# Altium PCB extern.PcbDoc
Units mil, origin at the board's own origin, x right, y up, seen from the top; angles counter-clockwise.
Board outline 1574.8 x 1181.1 mil, 2 copper layers (Top Layer, Bottom Layer); 7 components, 11 nets, 32 pads, 4 vias.
Unrouted connection lines stored in the file: 4.
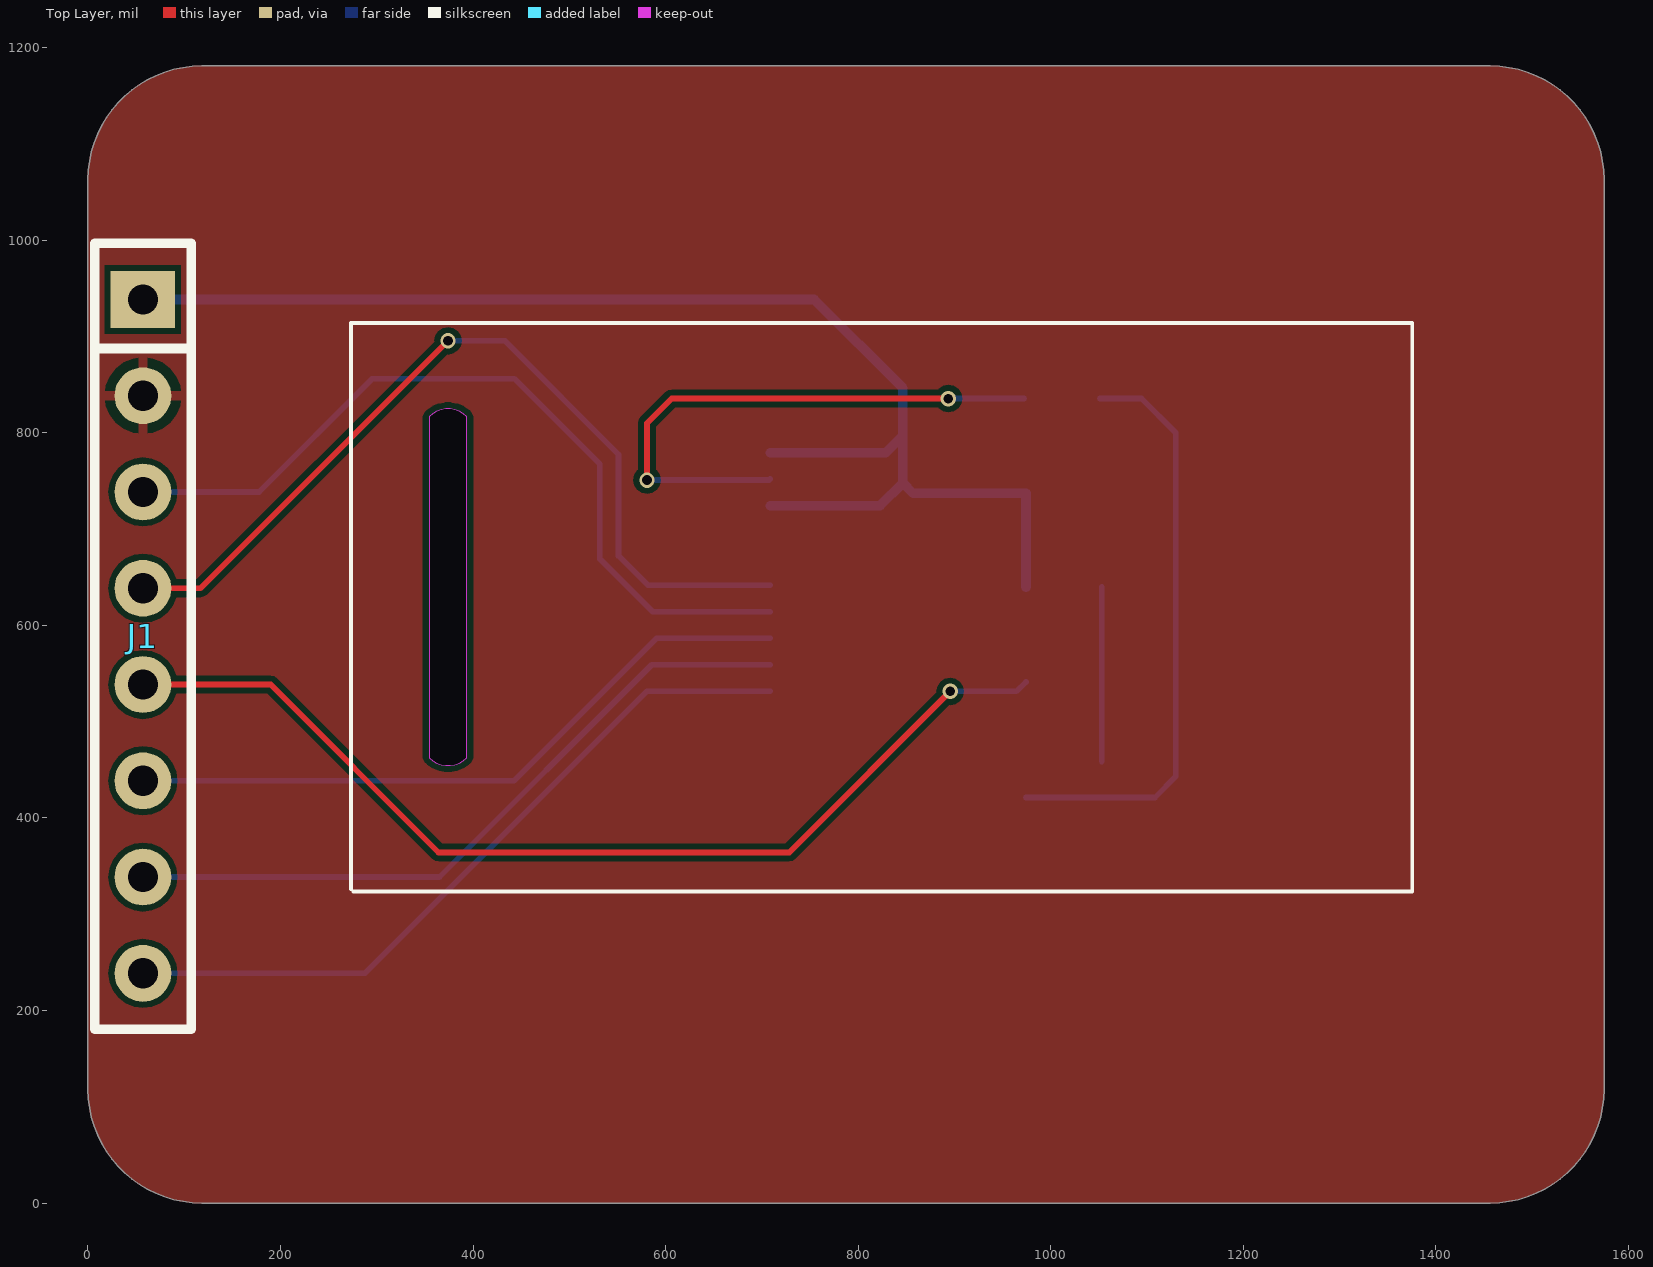
[diagram p0: Top Layer view]
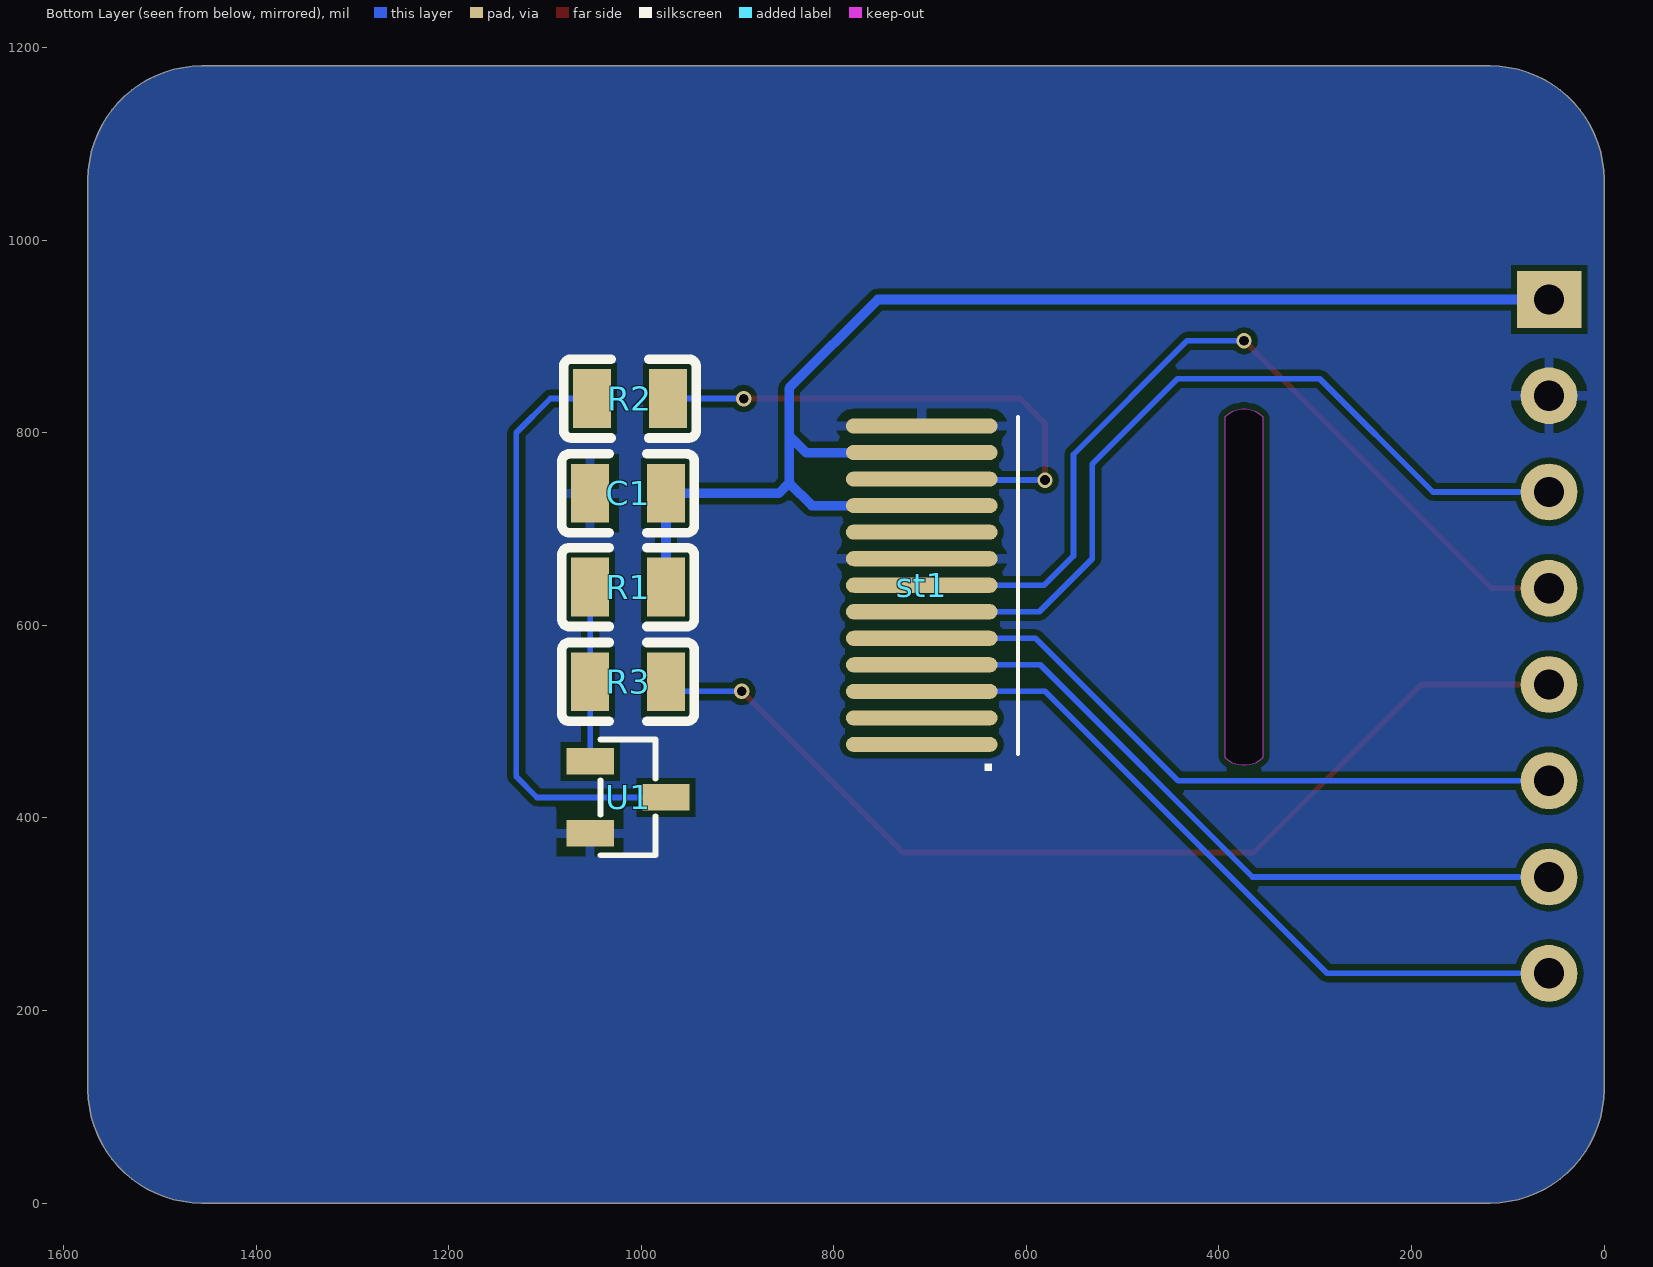
[diagram p1: Bottom Layer view, seen from below]
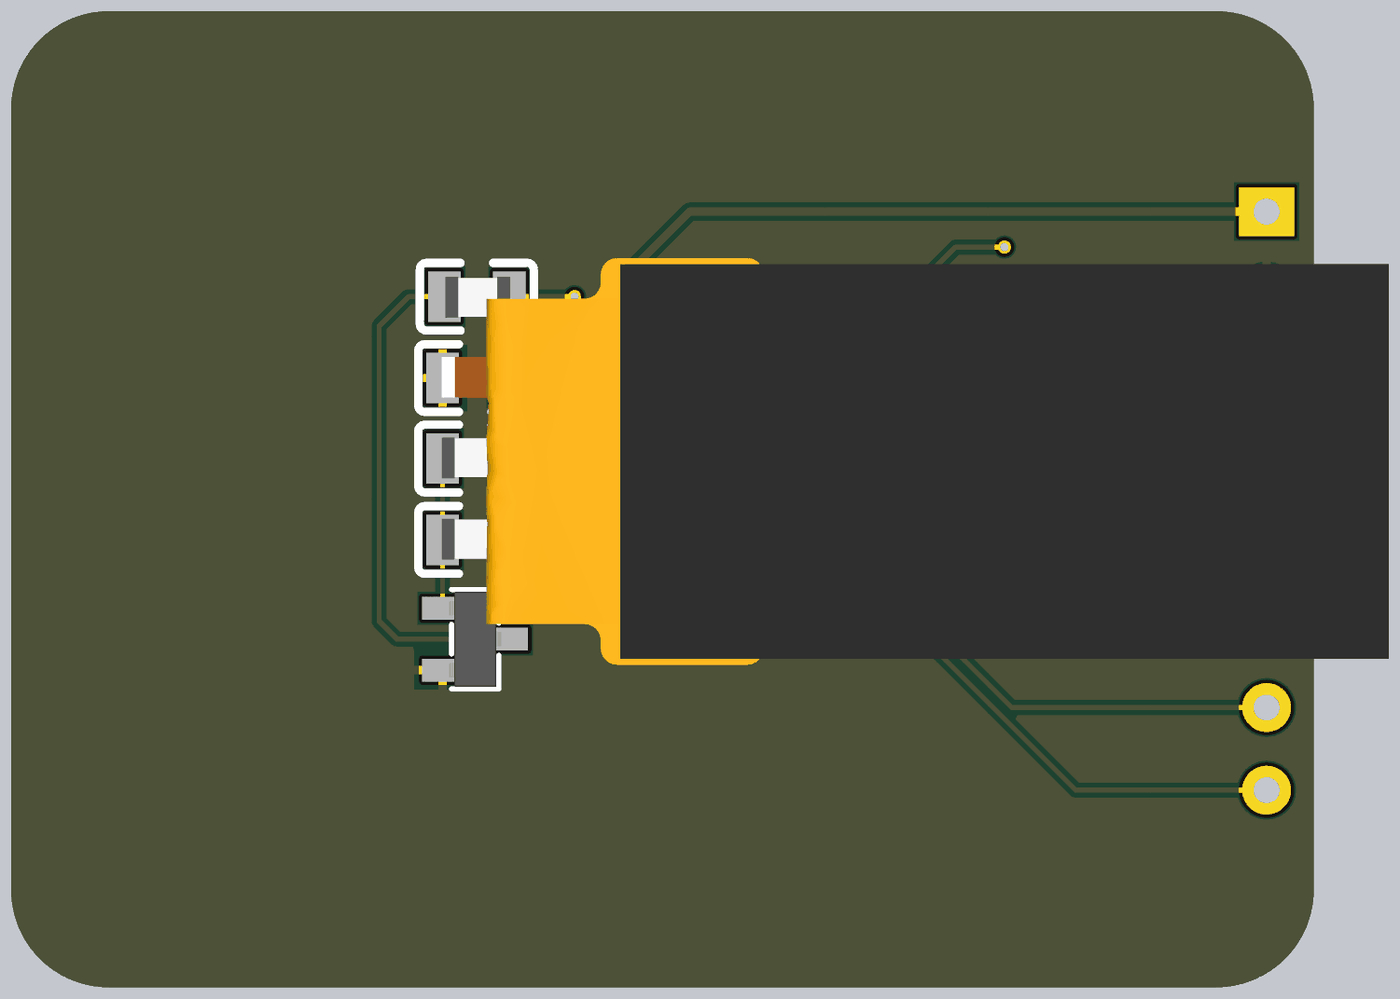
[diagram p2: 3D render of the assembled board from below, using the file's embedded part models]

## Layer stack, top to bottom
Top Solder: solder mask 0.4, Solder Resist, Dk 3.5
Top Layer: signal copper 1.4
Dielectric 1: dielectric 12.6, FR-4, Dk 4.8
Bottom Layer: signal copper 1.4
Bottom Solder: solder mask 0.4, Solder Resist, Dk 3.5

## Board outline
0,118.11 0,1062.99 cw(c118.11,1062.99) 118.11,1181.1 1456.69,1181.1 cw(c1456.69,1062.99) 1574.8,1062.99 1574.8,118.11 cw(c1456.69,118.11) 1456.69,0 118.11,0 cw(c118.11,118.11)
cut-out: 354.33,462.6 ccw(c374.02,482.28) 393.7,462.6 393.7,816.93 ccw(c374.02,797.24) 354.33,816.93

## Design rules (kind name [scope] priority, off if disabled: settings)
Clearance [All] p1: gap=6 ignorepadtopadclearanceinfootprint=FALSE except(10: Arc-Arc Arc-Track Track-Track)
ComponentClearance [All] p1 off: gap=10 collisioncheckmode=3 verticalgap=10 showdistances=FALSE
PolygonConnect [All] p1: connectstyle=Relief reliefconductorwidth=10 reliefentries=4 polygonreliefangle="90 Angle" airgapwidth=10
RoutingVias [All] p1: holewidth=8 width=16 viastyle="Through Hole" minholewidth=6 minwidth=12 maxholewidth=28 maxwidth=50
SolderMaskExpansion [All] p1: expansion=4 istentingtop=FALSE
Width [All] p1: maxlimit=20 minlimit=6 preferedwidth=10
29 further rules are at their usual default settings.

## Classes and differential pairs
component class extern: C1 R1 R2 R3 U1

## Components (designator, comment, footprint, x,y, rotation, side; value= is the part's Value field where it differs from the comment)
C1 "1uf" C0805 949.88,703.15 r0 bottom
J1 "8P" 8P-P2.54 57.09,588.58 r270 top locked
R1 "10k" R0805 949.88,605.71 r0 bottom
R2 "10" R0805 1075.71,869.68 r180 bottom
R3 "1k" R0805 949.88,507.28 r0 bottom
st1 "st7735s" st7735s 638.66,451.38 r180 bottom locked
U1 "S8050_C908252" s8050 1013.78,421.26 r0 bottom

## Footprints (in the part's own frame and the unit in brackets; to place one, negate y for a bottom-side part, rotate by r counter-clockwise, add the part's x,y. Pads: shape width x height; smd on the part's side, far side on the other; paste and mask are expansions set on the pad)
8P-P2.54 [mm] "J8"
  rect 1.5x1.7 hole 0.8: 1(-8.89,0)
  round 1.5 hole 0.8: 2(-6.35,0) 3(-3.81,0) 4(-1.27,0) 5(1.27,0) 6(3.81,0) 7(6.35,0) 8(8.89,0)
  silkscreen extent -10.37,-1.27 10.37,1.27
C0805 [mm] "C?"
  rect 1x1.55 smd: 1(0.623,-0.865) 2(2.623,-0.865)
  silkscreen extent -0.13,-1.91 3.37,0.18, body extent 0.65,-1.51 2.65,-0.26, height 0.6
R0805 [mm] "R?"
  rect 1x1.55 smd: 1(0.623,-0.865) 2(2.623,-0.865)
  silkscreen extent -0.13,-1.91 3.37,0.18, body extent 0.65,-1.52 2.65,-0.26, height 0.43
s8050 [mm] "SOT-23-3_L2.9-W1.3-P1.90-LS2.4-BR"
  rect 1.25x0.7 smd: 1(1,-0.95) 2(1,0.95) 3(-1,0)
  silkscreen extent -0.73,-1.53 0.73,1.53, body extent -1.23,-1.46 1.25,1.46, height 0.65
st7735s [mm] "st7735s?"
  oval 4x0.4 smd: 1(-1.778,0.635) 2(-1.778,1.335) 3(-1.778,2.035) 5(-1.778,3.435) 6(-1.778,4.135) 7(-1.778,4.835) 8(-1.778,5.535) 9(-1.778,6.235) 10(-1.778,6.935) 11(-1.778,7.635) 12(-1.778,8.335) 13(-1.778,9.035)
  oval 4x0.4 smd paste+0: 4(-1.778,2.735)
  silkscreen extent -0.13,-0.07 0.76,9.27, body extent -9.19,-1.55 18.53,10.95, height 1.55

## Part data
C1: library part C0805
R1 R2 R3: library part R0805
U1: library part s8050

## Via types
v1: diameter 16, hole 10, Top Layer to Bottom Layer, 4 vias

## Nets (pads, with @x,y where several pads share a name; then routed paths per layer and width w, separated by ;. In a path a pad name is that pad's centre, name@x,y a point inside that pad or via, vN(x,y) a via of type N, cw(c..) or ccw(c..) an arc to the next point about the centre after c; other vN are vias at no path point)
+3.3: C1.1 J1.1 R1.1 st1.10 st1.12 | length 1448.5
  Bottom Layer w10: J1.1 754.33,938.58 846.46,846.46 846.46,797.24 ; st1.10 822.83,724.41 846.46,748.03 ; st1.12 828.74,779.53 846.46,797.24 ; R1.1 C1.1 857.28,737.2 846.46,748.03 ; 846.46,748.03 846.46,797.24
GND: C1.2 J1.2 st1.8 st1.13 U1.2
LEDK: R2.2 st1.11 | length 589.7
  Top Layer w6: v1(580.71,750.98) 580.71,810.04 606.3,835.63 v1(893.7,835.63)
  Bottom Layer w6: v1(580.71,750.98) 707.68,750.98 st1.11 ; v1(893.7,835.63) R2.2
NetR1_2: R1.2 R3.2 U1.1 | length 181.1
  Bottom Layer w6: U1.1 R3.2 R1.2
NetR2_1: R2.1 U1.3 | length 615.2
  Bottom Layer w6: U1.3 1108.27,421.26 1129.92,442.91 1129.92,800.2 1094.49,835.63 R2.1
TFT_BLK: J1.5 R3.1 | length 1063
  Top Layer w6: J1.5 189.76,538.58 364.17,364.17 728.35,364.17 v1(895.67,531.5)
  Bottom Layer w6: v1(895.67,531.5) 964.57,531.5 R3.1
TFT_CS: J1.4 st1.7 | length 924.9
  Top Layer w6: J1.4 116.93,638.58 v1(374.02,895.67)
  Bottom Layer w6: v1(374.02,895.67) 433.07,895.67 551.18,777.56 551.18,672.23 581.68,641.73 st1.7
TFT_DC: J1.6 st1.5 | length 734.6
  Bottom Layer w6: J1.6 442.54,438.58 590.57,586.61 st1.5
  Bottom Layer w10: J1.6 J1.6@72.44,423.23
TFT_RES: J1.3 st1.6 | length 858.3
  Bottom Layer w6: J1.3 177.56,738.58 295.28,856.3 442.91,856.3 531.5,767.72 531.5,669.29 586.61,614.17 st1.6
TFT_SCL: J1.7 st1.4 | length 742.9
  Bottom Layer w6: J1.7 365.17,338.58 585.64,559.06 st1.4
TFT_SDA: J1.8 st1.3 | length 772.9
  Bottom Layer w6: J1.8 287.8,238.58 580.71,531.5 st1.3
pads on no net: st1.1 st1.2 st1.9

## Polygon pours and split planes (outlines as drawn)
GND on Top Layer "Top Layer-No Net" (solid, remove dead copper, pour order 0): 0,118.11 0,1062.99 cw(c118.11,1062.99) 118.11,1181.1 1456.69,1181.1 cw(c1456.69,1062.99) 1574.8,1062.99 1574.8,118.11 cw(c1456.69,118.11) 1456.69,0 118.11,0 cw(c118.11,118.11)
GND on Bottom Layer "Top Layer-No Net1" (solid, remove dead copper, pour order 1): 0,118.11 0,1062.99 cw(c118.11,1062.99) 118.11,1181.1 1456.69,1181.1 cw(c1456.69,1062.99) 1574.8,1062.99 1574.8,118.11 cw(c1456.69,118.11) 1456.69,0 118.11,0 cw(c118.11,118.11)

## Silkscreen, mask and mechanical layers (free items; w line width, h text height)
Top Overlay:
  lines w3.94: 273.33,326.04 273.33,914.23 1375.7,914.23 1375.7,323.68 275.7,323.68
Mechanical 1:
  lines w3.94: 0,118.11 0,1062.99 ; 118.11,0 1456.69,0 ; 118.11,1181.1 1456.69,1181.1 ; 1574.8,118.11 1574.8,1062.99 ; 354.33,462.6 ccw(c374.02,482.28) 393.7,462.6 393.7,816.93 ccw(c374.02,797.24) 354.33,816.93 354.33,462.6
Mechanical 13:
  lines w3.94: 0,118.11 ccw(c118.11,118.11) 118.11,0 ; 0,1062.99 cw(c118.11,1062.99) 118.11,1181.1 ; 1456.69,0 ccw(c1456.69,118.11) 1574.8,118.11 ; 1456.69,1181.1 cw(c1456.69,1062.99) 1574.8,1062.99